# Altium PCB CCU-2.PcbDoc (part 3 of 3)
Units mm, origin at the board's own origin, x right, y up, seen from the top; angles counter-clockwise.
Board outline 52 x 56 mm, 4 copper layers (Top Layer, Int1 (GND), Int2 (PWR), Bottom Layer), stack 1.594 mm thick; 81 components, 50 nets, 261 pads, 97 vias.
Unrouted connection lines stored in the file: 64.
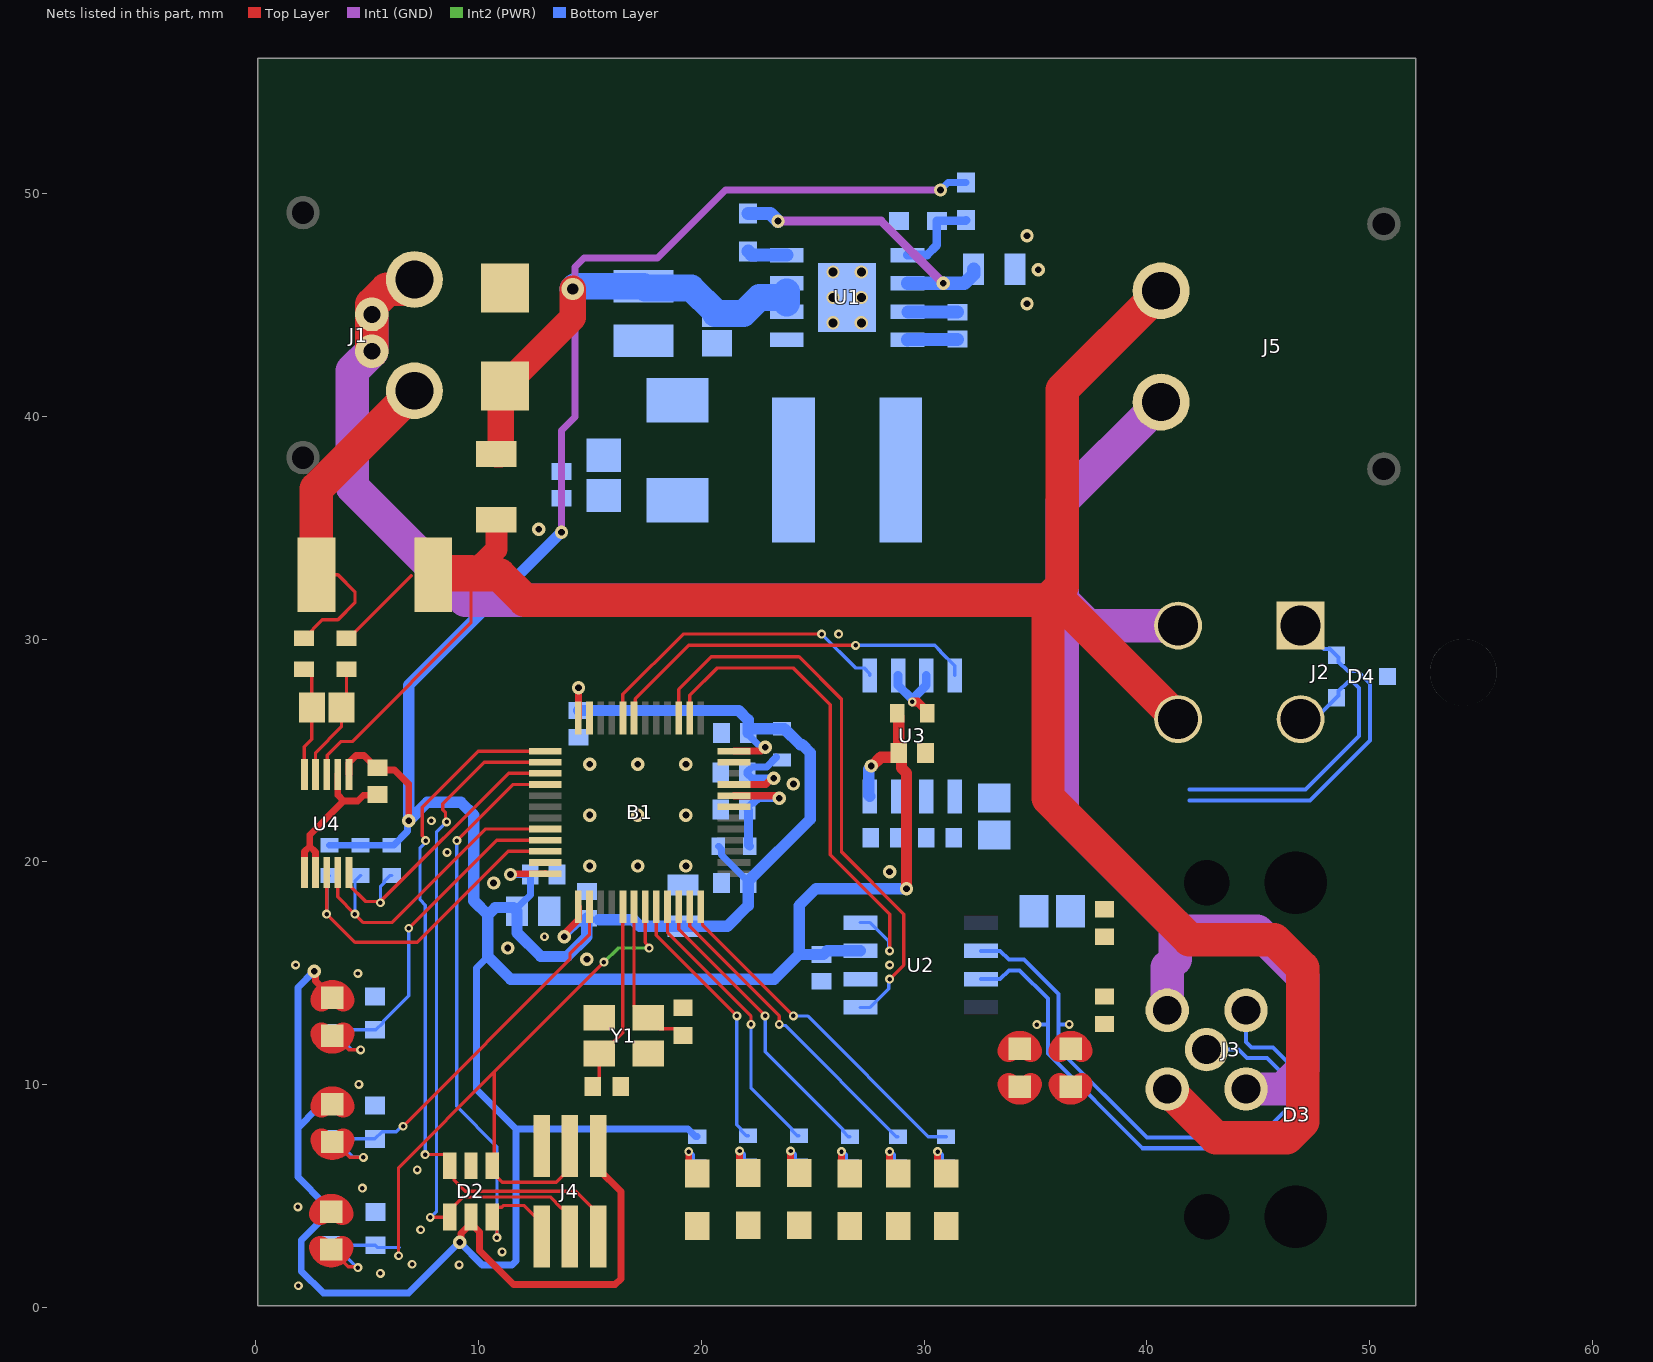
[diagram p4: the nets of this part, all layers, seen from the top]

## Part data (continued)
R1 R2: library part CMP-2100-03662-2, "RES SMD 100K OHM 1% 1/10W 0603", Case Code (Imperial)=0603, Case Code (Metric)=1608, Max Operating Temperature=155°C, Max Power Dissipation=100mW, Min Operating Temperature=-55°C, Resistance=100kR, Resistance Tolerance=1%, Resistor Type="Thick Film", Temperature Coefficient=100ppm/°C, Voltage Rating=50V, Working Voltage=75V, Case/Package=0603, Construction=Rectangular, Depth=0.8mm, Features="Moisture Resistant", Height=0.45mm, Lead Free="Lead Free", Length=1.6mm, Military Standard=Not, Number of Pins=2, Number of Terminations=2, Packaging="Tape and Reel", Power Rating=100mW, REACH SVHC="No SVHC", RoHS Compliant=Yes, Series=RC, Technology="THICK FILM", Termination=SMD/SMT, Tolerance=1%, Voltage Rating (DC)=50V, Width=0.8mm
R3: library part CMP-03412-037801-1, "RES SMD 43.2K OHM 1% 1/10W 0603", Case Code (Imperial)=0603, Case Code (Metric)=1608, Max Operating Temperature=155°C, Max Power Dissipation=100mW, Min Operating Temperature=-55°C, Package Quantity=1, Resistance=43.2kR, Resistor Type="Thick Film", Temperature Coefficient=100ppm/°C, Tolerance=1%, Voltage Rating=50V, Case/Package=0603, Construction=Rectangular, Depth=0.8mm, Features="Moisture Resistant", Height=0.45mm, Lead Free="Lead Free", Length=1.6mm, Military Standard=Not, Mount="Surface Mount", Number of Terminations=2, Packaging="Tape and Reel", Power Rating=100mW, RoHS Compliant=Yes, Series=RC, Size Code=0603, Technology="THICK FILM", Termination=SMD/SMT, Voltage Rating (DC)=50V, Width=0.031inch
R4 R12 R13 R14: library part CMP-2100-03664-2, "RES 10K OHM 1% 1/10W 0603", Case Code (Imperial)=0603, Case Code (Metric)=1608, Max Operating Temperature=155°C, Max Power Dissipation=100mW, Min Operating Temperature=-55°C, Resistance=10kR, Resistance Tolerance=1%, Resistor Type="Thick Film", Temperature Coefficient=100ppm/°C, Voltage Rating=75V, Voltage Rating (DC)=50V, Case/Package=0603, Construction=Rectangular, Depth=0.8mm, Features="Moisture Resistant", Height=0.45mm, Lead Free="Lead Free", Lead Pitch=0.3mm, Length=1.6mm, Military Standard=Not, Number of Pins=2, Number of Terminations=2, Packaging="Tape and Reel", Power Rating=100mW, RoHS Compliant=Yes, Series=RC, Size Code=0603, Termination=SMD/SMT, Tolerance=1%, Weight=7.1E-05oz, Width=0.8mm
R5 R6 R7 R8: library part CMP-02407-003155-1, "RES Thick Film, 60.4Ω, 1%, 0.1W, 100ppm/°C, 0603", Case/Package=0603, Max Operating Temperature=155°C, Max Power Dissipation=100mW, Min Operating Temperature=-55°C, Package Quantity=20000, Resistance=60.4R, Temperature Coefficient=100ppm/°C, Tolerance=1%, Composition="Thick Film", Features="Automotive AEC-Q200", Height=0.02inch, Lead Free="Lead Free", Length=0.061inch, Number of Terminations=2, Packaging="Tape and Reel", Width=0.033inch
R9 R10: library part CMP-1659-00008-4, "Chip Resistor, 10 Ohm, +/- 1%, 0.1 W, -55 to 155 degC, 0603 (1608 Metric), RoHS, Tape and Reel", Manufacturer=Yageo, Max Operating Temperature="155 degC", Min Operating Temperature="-55 degC", Package Quantity=200, Voltage Rating="50 V", ComponentLink1Description="Manufacturer URL", ComponentLink1URL=http://www.yageo.com/, ComponentLink2Description=Datasheet, ComponentLink2URL=http://www.yageo.com/documents/recent/PYu-RC_Group_51_RoHS_L_04.pdf, ComponentLink3Description="Package Specification", ComponentLink3URL=http://www.farnell.com/datasheets/443971.pdf, DatasheetVersion="Rev. 4, 02/2016", Height="0.45 mm", Length="1.6 mm", Mount="Surface Mount", Mounting Technology="Surface Mount", PackageDescription="2-Pin Surface Mount Device, Body 1.6 x 0.8 mm", PackageReference=0603, Packaging="Tape and Reel", Pins=2, REACH SVHC="No SVHC", RoHSCompliant=true
R11: library part CMP-26527-006624-1, "Foil on Ceramic Current Sensing Chip Resistor 43mΩ ±1% 2W 2512 AEC Qualified", Max Operating Temperature=170°C, Min Operating Temperature=-55°C, Tolerance=1%, Mount="Surface Mount", RoHS Compliant=Yes
R15 R16 R17: library part CMP-2000-05022-1, "Resistor, 10 KOhm, +/- 5%, 100 mW, -55 to 155 degC, 0603 (1608 Metric), RoHS, Tape and Reel", Case Code - in=0603, Case Code - mm=1608, Manufacturer=Yageo, Operating Temperature Range=-55Cto+155C, Package Description="2-Pin Surface Mount Device, Body 1.6 x 0.8 mm", Package Reference=603, Power Rating=100mW, Resistance=10kOhms, Temperature Coefficient=100PPM/C, Tolerance=5%, Voltage Rating=50V, Datasheet URL=http://www.farnell.com/datasheets/443971.pdf, Datasheet Version="Rev. 4, 04/2009", Manufacturer URL=http://www.yageo.com/, Packaging=Reel, Product=ThickFilmResistorsGeneralPurpose, Series=RC, Termination Style=SMD/SMT
R18 R19 R20 R21 R22 R23: library part CMP-1659-00009-5, "RES 1K OHM 1% 1/10W 0603", Case Code (Imperial)=0603, Case Code (Metric)=1608, Max Operating Temperature=155°C, Max Power Dissipation=100mW, Min Operating Temperature=-55°C, Resistance=1kR, Resistance Tolerance=1%, Resistor Type="Thick Film", Temperature Coefficient=100ppm/°C, Voltage Rating=50V, Case/Package=0603, Construction=Rectangular, Contact Plating=Tin, Depth=0.8mm, Features="Moisture Resistant", Height=0.45mm, Lead Free="Lead Free", Length=1.6mm, Military Standard=Not, Number of Terminations=2, Packaging="Tape and Reel", Power Rating=100mW, Radiation Hardening=No, REACH SVHC="No SVHC", RoHS Compliant=Yes, Series=RC, Size Code=0603, Technology="THICK FILM", Termination=SMD/SMT, Tolerance=1%
SB1 SB2 SB3 SB4 SB5: "Bridge 0.5mm gap, 2mm width"
U1: "SIMPLE SWITCHER® 3.8V to 36V, 3A Synchronous Buck Converter With Ultra-Low EMI 8-SO PowerPAD -40 to 125", Manufacturer="Texas Instruments", Manufacturer Lifecycle Status=ACTIVE, Max Junction Temperature (Tj)=150°C, Max Operating Temperature=125°C, Max Supply Voltage=36V, Min Operating Temperature=-40°C, Min Supply Voltage=3.8V, Mouser Part Number=595-LMR33630ADDAR, Nominal Supply Current=24µA, Output Current=3A, Supplier Part Number=296-49763-1-ND, Switching Frequency=400kHz, Arrow Part Number=LMR33630ADDAR, Arrow Price/Stock=https://www.arrow.com/en/products/lmr33630addar/texas-instruments?utm_currency=USD&region=nac, Category="Voltage Regulators - Switching", ComponentLink1Description=https://octopart.com:443/opatz8j6/c1?t=vB-rOmDI1ErJ0w3fCj8NLsfgClszgTUVbAqCYHM5mRqgzR9RBB5Pla--LZzs2g-5lBj7oDBEHLOY0DNQ8kiPC6C8g1CaFcIk5xusZs0FtDRH-CQ1FAZX0wQ7Af0vopd1OvNJ_Hrieycu-9D8HxSeoZovH4OJEcn7j74SeItdt-lCJsWpQWgV8-mVR1JIQ1KywJKCZ68bDiAWG91PubKPct48upMq1AnCkLHjDL3bhpicF0q3kjtxBAWzeDQzkpoQooz9GAvObiI6PlzZfk112pcCDh0P81IWp_Rr5acb26OlKDk2j5b40au3vy2C1-LFGDaZycRESUfyv9lqHnr9FsK7A0AJECnAAloOYp_c-_g9Mk5jVvAjSOs1Y_7rtCi9vouLs8vl&src-supplier=Texas+Instruments, ComponentLink1URL=https://octopart.com:443/opatz8j6/c1?t=vB-rOmDI1ErJ0w3fCj8NLsfgClszgTUVbAqCYHM5mRqgzR9RBB5Pla--LZzs2g-5lBj7oDBEHLOY0DNQ8kiPC6C8g1CaFcIk5xusZs0FtDRH-CQ1FAZX0wQ7Af0vopd1OvNJ_Hrieycu-9D8HxSeoZovH4OJEcn7j74SeItdt-lCJsWpQWgV8-mVR1JIQ1KywJKCZ68bDiAWG91PubKPct48upMq1AnCkLHjDL3bhpicF0q3kjtxBAWzeDQzkpoQooz9GAvObiI6PlzZfk112pcCDh0P81IWp_Rr5acb26OlKDk2j5b40au3vy2C1-LFGDaZycRESUfyv9lqHnr9FsK7A0AJECnAAloOYp_c-_g9Mk5jVvAjSOs1Y_7rtCi9vouLs8vl&src-supplier=Texas+Instruments, ComponentLink2Description=https://sigma.octopart.com:443/104526336/technical_drawing/Texas-Instruments-LMR33630ADDAR.pdf?src-supplier=Texas+Instruments, ComponentLink2URL=https://sigma.octopart.com:443/104526336/technical_drawing/Texas-Instruments-LMR33630ADDAR.pdf?src-supplier=Texas+Instruments, ComponentLink3Description=https://sigma.octopart.com:443/49250132/technical_drawing/Texas-Instruments-LMR33630ADDAR.pdf?src-supplier=Texas+Instruments, ComponentLink3URL=https://sigma.octopart.com:443/49250132/technical_drawing/Texas-Instruments-LMR33630ADDAR.pdf?src-supplier=Texas+Instruments, ComponentLink4Description=https://datasheet.octopart.com:443/LMR33630ADDAR-Texas-Instruments-datasheet-148393519.pdf?src-supplier=Upverter, ComponentLink4URL=https://datasheet.octopart.com:443/LMR33630ADDAR-Texas-Instruments-datasheet-148393519.pdf?src-supplier=Upverter, ComponentLink5Description=https://datasheet.octopart.com:443/LMR33630ADDAR-Texas-Instruments-datasheet-163730535.pdf?src-supplier=LCSC, ComponentLink5URL=https://datasheet.octopart.com:443/LMR33630ADDAR-Texas-Instruments-datasheet-163730535.pdf?src-supplier=LCSC, ComponentLink6Description=http://sigma.octopart.com:80/reach_statement/Texas-Instruments-company-64.pdf?src-supplier=Compliance+Statements, ComponentLink6URL=http://sigma.octopart.com:80/reach_statement/Texas-Instruments-company-64.pdf?src-supplier=Compliance+Statements, ComponentLink7Description=http://sigma.octopart.com:80/conflict_mineral_statement/Texas-Instruments-company-63.pdf?src-supplier=Compliance+Statements, ComponentLink7URL=http://sigma.octopart.com:80/conflict_mineral_statement/Texas-Instruments-company-63.pdf?src-supplier=Compliance+Statements, Datasheet Link=http://www.ti.com/lit/gpn/lmr33630, Geometry.Height=1.7mm, Height=1.7mm, Length=4.89mm, Lifecycle Status=Production, Manufacturer Part Number=LMR33630ADDAR, Manufacturer_Name="Texas Instruments", Manufacturer_Part_Number=LMR33630ADDAR, Max Duty Cycle=98%, Mouser Price/Stock=https://www.mouser.co.uk/ProductDetail/Texas-Instruments/LMR33630ADDAR?qs=r5DSvlrkXmJQkBTqgVdiDA%3D%3D, Number of Channels=1, Number of Outputs=1, Pins=8, Pricing="1=2,55, 10=1,895, 25=1,732, 100=1,5527, 250=1,4672, 500=1,41566, 1000=1,37324 (USD)", RoHS=Compliant, Schedule B=8542390000, Stock=3306, Supplier=DigiKey, Thickness=1.48mm, Topology=Buck, Width=3.9mm
U2: "3.3-V CAN Transceivers with CAN FD (Flexible Data Rate) 8-SOIC -40 to 125", Case/Package=SOIC, Manufacturer="Texas Instruments", Manufacturer Lifecycle Status=ACTIVE, Max Operating Temperature=125°C, Min Operating Temperature=-40°C, Supplier Part Number=296-48678-1-ND, Category="CAN Transceivers", ComponentLink1Description=https://datasheet.octopart.com:443/TCAN332GDR-Texas-Instruments-datasheet-62057962.pdf?src-supplier=Texas+Instruments, ComponentLink1URL=https://datasheet.octopart.com:443/TCAN332GDR-Texas-Instruments-datasheet-62057962.pdf?src-supplier=Texas+Instruments, ComponentLink2Description=https://octopart.com:443/opatz8j6/c1?t=Fim9K0uhurL3e-64ewRPRu2hzD6XBMTpaS3peMNeRQGdAPJMxV5dpDLVgJyuO_P4O4ggunH2lrh5amG8cDN644qOKp-rMrPHwRhWUIrHn0bzeZVVUbsr2M72b6PgQlxLldm4RQX58xtipHIVUQ9n3j21H1DkLh4_7SXPzTuHaIsBH9AF2gycgFMmCo2d18ECHdzunFD4nFXD1uZ0NZyu2cFq_vDtF5TCh3oQofcxl6XlKc8IRlGphMiWX1-H-GrJRfCOqdlBEaN3yoeUESa4Rdelhx3RTUBrPKmhDb-oLKbaFhGIFdCz5qUOKi7WlXgmp3d98vxT9kb4idGeRYMwJbKCxTgnxtzothCZpspf30IxwGF7roI0pcaKLIGA-2bwGuZ5fiI&src-supplier=Texas+Instruments, ComponentLink2URL=https://octopart.com:443/opatz8j6/c1?t=Fim9K0uhurL3e-64ewRPRu2hzD6XBMTpaS3peMNeRQGdAPJMxV5dpDLVgJyuO_P4O4ggunH2lrh5amG8cDN644qOKp-rMrPHwRhWUIrHn0bzeZVVUbsr2M72b6PgQlxLldm4RQX58xtipHIVUQ9n3j21H1DkLh4_7SXPzTuHaIsBH9AF2gycgFMmCo2d18ECHdzunFD4nFXD1uZ0NZyu2cFq_vDtF5TCh3oQofcxl6XlKc8IRlGphMiWX1-H-GrJRfCOqdlBEaN3yoeUESa4Rdelhx3RTUBrPKmhDb-oLKbaFhGIFdCz5qUOKi7WlXgmp3d98vxT9kb4idGeRYMwJbKCxTgnxtzothCZpspf30IxwGF7roI0pcaKLIGA-2bwGuZ5fiI&src-supplier=Texas+Instruments, ComponentLink3Description=https://datasheet.octopart.com:443/TCAN332GDR-Texas-Instruments-datasheet-61500394.pdf?src-supplier=Texas+Instruments, ComponentLink3URL=https://datasheet.octopart.com:443/TCAN332GDR-Texas-Instruments-datasheet-61500394.pdf?src-supplier=Texas+Instruments, ComponentLink4Description=https://sigma.octopart.com:443/49249642/technical_drawing/Texas-Instruments-TCAN332GDR.pdf?src-supplier=Texas+Instruments, ComponentLink4URL=https://sigma.octopart.com:443/49249642/technical_drawing/Texas-Instruments-TCAN332GDR.pdf?src-supplier=Texas+Instruments, ComponentLink5Description=https://datasheet.octopart.com:443/TCAN332GDR-Texas-Instruments-datasheet-192327331.pdf?src-supplier=HQonline, ComponentLink5URL=https://datasheet.octopart.com:443/TCAN332GDR-Texas-Instruments-datasheet-192327331.pdf?src-supplier=HQonline, ComponentLink6Description=https://datasheet.octopart.com:443/TCAN332GDR-Texas-Instruments-datasheet-159117518.pdf?src-supplier=LCSC, ComponentLink6URL=https://datasheet.octopart.com:443/TCAN332GDR-Texas-Instruments-datasheet-159117518.pdf?src-supplier=LCSC, ComponentLink7Description=https://datasheet.octopart.com:443/TCAN332GDR-Texas-Instruments-datasheet-149637585.pdf?src-supplier=SHENGYU+ELECTRONICS, ComponentLink7URL=https://datasheet.octopart.com:443/TCAN332GDR-Texas-Instruments-datasheet-149637585.pdf?src-supplier=SHENGYU+ELECTRONICS, ComponentLink8Description=http://sigma.octopart.com:80/reach_statement/Texas-Instruments-company-64.pdf?src-supplier=Compliance+Statements, ComponentLink8URL=http://sigma.octopart.com:80/reach_statement/Texas-Instruments-company-64.pdf?src-supplier=Compliance+Statements, ComponentLink9Description=http://sigma.octopart.com:80/conflict_mineral_statement/Texas-Instruments-company-63.pdf?src-supplier=Compliance+Statements, ComponentLink9URL=http://sigma.octopart.com:80/conflict_mineral_statement/Texas-Instruments-company-63.pdf?src-supplier=Compliance+Statements, Height=1.75mm, Lead Free="Lead Free", Length=4.9mm, Lifecycle Status=Production, Manufacturer Part Number=TCAN332GDR, Pins=8, Pricing="1=2,71, 10=2,021, 25=1,848, 100=1,6576, 250=1,56684, 500=1,53152 (USD)", RoHS=Compliant, Stock=4774, Supplier=DigiKey, Thickness=1.58mm, Width=3.91mm
U3: "3.3-V to 5-V 500-Kbps half-duplex RS-485 transceiver auto-direction control ±12-kV IEC ESD 8-SOIC -40 to 125", Case/Package=SOIC, Manufacturer="Texas Instruments", Manufacturer Lifecycle Status=ACTIVE, Supplier Part Number=296-THVD1406DRCT-ND, Category="Integrated Circuits (ICs)", ComponentLink1Description=https://octopart.com:443/opatz8j6/c1?t=2lI__BkUQ1xwY9kHNd8eYxCAM8iLM_FgltEQ1IO6ko7_J5dzlRfErhoS2VuXg-axmu35tHe6xFiPe7MYKPFvV-dy3nIG9s3NJA0ErWfdrKDirdlmgh356IG-PQ2XWgFJDCJccpoQtQsg13hA_5m5lKyDGmkMVNChYEag8uk4WHNZpCeqeZyq-o13vnhtIUj1o03Pf3jmRR3w8kDw90f-34G7o4yUBoqAoakg1O24sFCcCpS3f5lc8pghjzV8L4mAcKX6y6PNE8Xs84P_YNErqjUnXhKNxf-NFzK6TWa9jK5NPoG9ddsY0OtA5ykFXF75BaeKJ_s9JvLxqkj3BXgq8qynINgxI_OyH86OW_yPFQ_-wlcyMHijrRmTrvovB-5KRqPFqPLR&src-supplier=Texas+Instruments, ComponentLink1URL=https://octopart.com:443/opatz8j6/c1?t=2lI__BkUQ1xwY9kHNd8eYxCAM8iLM_FgltEQ1IO6ko7_J5dzlRfErhoS2VuXg-axmu35tHe6xFiPe7MYKPFvV-dy3nIG9s3NJA0ErWfdrKDirdlmgh356IG-PQ2XWgFJDCJccpoQtQsg13hA_5m5lKyDGmkMVNChYEag8uk4WHNZpCeqeZyq-o13vnhtIUj1o03Pf3jmRR3w8kDw90f-34G7o4yUBoqAoakg1O24sFCcCpS3f5lc8pghjzV8L4mAcKX6y6PNE8Xs84P_YNErqjUnXhKNxf-NFzK6TWa9jK5NPoG9ddsY0OtA5ykFXF75BaeKJ_s9JvLxqkj3BXgq8qynINgxI_OyH86OW_yPFQ_-wlcyMHijrRmTrvovB-5KRqPFqPLR&src-supplier=Texas+Instruments, ComponentLink2Description=https://datasheet.octopart.com:443/THVD1406DR-Texas-Instruments-datasheet-183820944.pdf?src-supplier=LCSC, ComponentLink2URL=https://datasheet.octopart.com:443/THVD1406DR-Texas-Instruments-datasheet-183820944.pdf?src-supplier=LCSC, ComponentLink3Description=https://datasheet.octopart.com:443/THVD1406DR-Texas-Instruments-datasheet-165811890.pdf?src-supplier=Augswan, ComponentLink3URL=https://datasheet.octopart.com:443/THVD1406DR-Texas-Instruments-datasheet-165811890.pdf?src-supplier=Augswan, ComponentLink4Description=http://sigma.octopart.com:80/reach_statement/Texas-Instruments-company-64.pdf?src-supplier=Compliance+Statements, ComponentLink4URL=http://sigma.octopart.com:80/reach_statement/Texas-Instruments-company-64.pdf?src-supplier=Compliance+Statements, ComponentLink5Description=http://sigma.octopart.com:80/conflict_mineral_statement/Texas-Instruments-company-63.pdf?src-supplier=Compliance+Statements, ComponentLink5URL=http://sigma.octopart.com:80/conflict_mineral_statement/Texas-Instruments-company-63.pdf?src-supplier=Compliance+Statements, Height=1.75mm, Length=4.9mm, Lifecycle Status=Production, Manufacturer Part Number=THVD1406DR, Pins=8, Pricing="1=1,72, 10=1,257, 25=1,1424, 100=1,0164, 250=0,95628, 500=0,92002, 1000=0,91494 (USD)", RoHS=Compliant, Stock=2789, Supplier=DigiKey, Thickness=1.58mm, Width=3.91mm
U4: "85-V, 16-bit, high-precision I2C output current/voltage/power monitor with alert 10-VSSOP -40 to 125", Case/Package=VSSOP, Manufacturer="Texas Instruments", Manufacturer Lifecycle Status=ACTIVE, Mouser Part Number=595-INA238AIDGSR, Supplier Part Number=296-INA238AIDGSRCT-ND, Arrow Part Number=INA238AIDGSR, Arrow Price/Stock=https://www.arrow.com/en/products/ina238aidgsr/texas-instruments?utm_currency=USD&region=nac, Category="Power Management ICs", ComponentLink1Description=https://octopart.com:443/opatz8j6/c1?t=XyVZTLNm9_ePY3ZGc7WnwxCxujItchuRLJj6CkysUxGARineyf7S9W1lTZtpdvGrKN9PqufXH2Vp5DF4iI0PAmLVRxJtPCoqMa_3Yx7EmCUprcLp9cc2z3mxrocYZYu_H6tNB4RLIZX8yc2_jZwFvl9kWmpghyBnfmfPNCcCHj9WG1KUH3fGvWh-B3Dty5OndKwLiTMuCynuZqQEMvhHYq8OKaCYxicPR-4azPIH5DLbeaRheWP409TW7_NNkIoSlBggBZt8vUz1AkFskQTI-fVfUp_rKcfapwS7xCCwZOKssU3R1jKvkQDpIuWALrIH0VMSswAvOfD7rtoRLVW_XHJHwA1DZFqMh2nUzRUR_hOiShUwC6jqqC2oc9QjG34mHHd3ibY&src-supplier=Texas+Instruments, ComponentLink1URL=https://octopart.com:443/opatz8j6/c1?t=XyVZTLNm9_ePY3ZGc7WnwxCxujItchuRLJj6CkysUxGARineyf7S9W1lTZtpdvGrKN9PqufXH2Vp5DF4iI0PAmLVRxJtPCoqMa_3Yx7EmCUprcLp9cc2z3mxrocYZYu_H6tNB4RLIZX8yc2_jZwFvl9kWmpghyBnfmfPNCcCHj9WG1KUH3fGvWh-B3Dty5OndKwLiTMuCynuZqQEMvhHYq8OKaCYxicPR-4azPIH5DLbeaRheWP409TW7_NNkIoSlBggBZt8vUz1AkFskQTI-fVfUp_rKcfapwS7xCCwZOKssU3R1jKvkQDpIuWALrIH0VMSswAvOfD7rtoRLVW_XHJHwA1DZFqMh2nUzRUR_hOiShUwC6jqqC2oc9QjG34mHHd3ibY&src-supplier=Texas+Instruments, ComponentLink2Description=https://datasheet.octopart.com:443/INA238AIDGSR-Texas-Instruments-datasheet-165811307.pdf?src-supplier=Augswan, ComponentLink2URL=https://datasheet.octopart.com:443/INA238AIDGSR-Texas-Instruments-datasheet-165811307.pdf?src-supplier=Augswan, ComponentLink3Description=https://datasheet.octopart.com:443/INA238AIDGSR-Texas-Instruments-datasheet-169738673.pdf?src-supplier=LCSC, ComponentLink3URL=https://datasheet.octopart.com:443/INA238AIDGSR-Texas-Instruments-datasheet-169738673.pdf?src-supplier=LCSC, ComponentLink4Description=http://sigma.octopart.com:80/reach_statement/Texas-Instruments-company-64.pdf?src-supplier=Compliance+Statements, ComponentLink4URL=http://sigma.octopart.com:80/reach_statement/Texas-Instruments-company-64.pdf?src-supplier=Compliance+Statements, ComponentLink5Description=http://sigma.octopart.com:80/conflict_mineral_statement/Texas-Instruments-company-63.pdf?src-supplier=Compliance+Statements, ComponentLink5URL=http://sigma.octopart.com:80/conflict_mineral_statement/Texas-Instruments-company-63.pdf?src-supplier=Compliance+Statements, Datasheet Link=https://www.ti.com/lit/ds/symlink/ina238.pdf?ts=1623483707955&ref_url=https%253A%252F%252Fwww.ti.com%252Fstore%252Fti%252Fen%252Fp%252Fproduct%252F%253Fp%253DINA238AIDGSR, Height=1.1mm, Length=3mm, Lifecycle Status=Production, Manufacturer Part Number=INA238AIDGSR, Manufacturer_Name="Texas Instruments", Manufacturer_Part_Number=INA238AIDGSR, Mouser Price/Stock=https://www.mouser.co.uk/ProductDetail/Texas-Instruments/INA238AIDGSR?qs=DRkmTr78QAQpWvQMAkqDfQ%3D%3D, Pins=10, Pricing="1=3,26, 10=2,447, 25=2,2428, 100=2,0184, 250=1,91132, 500=1,88344 (USD)", RoHS=Compliant, Schedule B="8542390000, 8542390000|8542390000|8542390000|8542390000|8542390000|8542390000|8542390000|8542390000|8542390000|8542390000|8542390000|8542390000|8542390000|8542390000|8542390000|8542390000|8542390000|8542390000|8542390000|8542390000|8542390000|8542390000|8542390000|85", Supplier=DigiKey, Supplier 1=DigiKey, Supplier Part Number 1=296-INA238AIDGSRCT-ND, Thickness=1.02mm, Width=3mm
Y1: library part CMP-27762-013973-3, "Crystal 24MHz ±10ppm (Tol) ±20ppm (Stability) 8pF FUND 50Ω 4-Pin SMD T/R"

## Via types
v1: diameter 0.4, hole 0.2, Top Layer to Bottom Layer, 35 vias
v2: diameter 0.6, hole 0.3, Top Layer to Bottom Layer, 33 vias
v3: diameter 0.4, hole 0.2, Top Layer to Bottom Layer, tented both sides, 13 vias
v4: diameter 0.6, hole 0.4, Top Layer to Bottom Layer, 6 vias
v5: diameter 0.4, hole 0.2, Top Layer to Bottom Layer, tented bottom, 4 vias
v6: diameter 1.5, hole 0.75, Top Layer to Bottom Layer, 2 vias
v7: diameter 6.5, hole 3.5, Top Layer to Bottom Layer, 2 vias
v8: diameter 0.6, hole 0.3, Top Layer to Bottom Layer, tented both sides, 1 vias
v9: diameter 1, hole 0.5, Top Layer to Bottom Layer, 1 vias

## Nets (pads, with @x,y where several pads share a name; then routed paths per layer and width w, separated by ;. In a path a pad name is that pad's centre, name@x,y a point inside that pad or via, vN(x,y) a via of type N, cw(c..) or ccw(c..) an arc to the next point about the centre after c; other vN are vias at no path point)
+3V3: B1.1 B1.24 B1.36 B1.48 C2.2 C3.1 C4.2 C10.1 C11.1 C13.1 C21.1 C22.1 C23.1 C24.1 C25.1 C26.1 C27.1 D2.5 FB1.2 FB2.2 J4.1 L1.2 R2.1 R4.2 R12.2 R13.2 R14.2 R15.2 R16.2 R23.2 SB3.1 U2.3 U3.8 U4.6 | length 220.3
  Top Layer w0.31: v2(2.616,15.088) 2.672,15.032 2.672,14.649 3.143,14.178 SB3.1@3.313,14.178 ; U4.6@4.175,23.917 4.175,24.457 4.483,24.765 4.843,24.765 5.386,24.222 C13.1@5.461,24.222 5.553,24.13 6.223,24.13 6.858,23.495 v2(6.858,21.844) ; v2(9.144,2.921) 9.199,2.976 9.199,3.304 D2.5@9.652,3.757 ; D2.5@9.652,4.057 D2.5@9.652,3.757 ; v2(11.43,19.431) 11.465,19.466 12.982,19.466 B1.48@12.987,19.471 ; v2(13.843,16.637) 13.898,16.692 13.898,16.829 14.475,17.405 B1.1@14.475,17.983 ; B1.36@14.475,26.459 14.477,26.461 14.477,27.812 v2(14.478,27.813) ; J4.1@15.367,7.242 15.367,6.217 16.383,5.201 16.383,1.27 16.129,1.016 11.557,1.016 10.033,2.54 10.033,3.376 D2.5@9.652,3.757 ; B1.24@21.463,24.971 22.685,24.971 v2(22.86,25.146)
  Top Layer w0.51: v2(27.629,24.303) 27.653,24.303 28.048,24.697 28.744,24.697 C11.1@28.864,24.817 ; R4.2@28.787,26.67 28.787,26.593 28.864,26.517 C11.1@28.864,24.892 C11.1@28.864,24.817 ; v2(29.21,18.796) 29.21,23.988 28.984,24.214 28.984,24.697 C11.1@28.864,24.817
  Int1 (GND) w0.31: v8(13.716,34.798) 13.716,39.37 14.319,39.973 14.319,46.704 14.732,47.117 18.034,47.117 21.082,50.165 v2(30.734,50.165)
  Bottom Layer w0.31: v2(2.616,15.088) 1.88,14.351 1.88,8.052 ; R12.2@3.302,20.743 R13.2@4.699,20.743 R14.2@6.096,20.743 6.173,20.743 6.803,21.373 6.803,21.789 v2(6.858,21.844) ; R16.2@3.429,4.294 R16.2@3.329,4.294 ; R15.2@3.429,9.059 3.285,8.915 2.743,8.915 1.88,8.052 ; 10.414,15.748 9.906,15.24 9.906,9.779 11.677,8.008 ; v2(11.43,19.431) C25.1@12.319,19.431 12.319,18.516 12.137,18.334 12.123,18.334 C23.1@11.72,17.931 ; v2(13.843,16.637) 14.605,17.399 14.85,17.399 C26.1@15.113,17.399 ; C24.1@14.478,26.797 v2(14.478,27.813) ; 15.367,17.399 15.401,17.399 ; R23.2@19.812,7.662 19.735,7.662 19.396,8.001 11.684,8.001 11.677,8.008 ; FB2.2@20.763,20.701 20.908,20.556 20.908,20.315 C21.1@22.098,19.125 ; C27.1@22.098,25.706 22.603,25.201 22.805,25.201 v2(22.86,25.146) ; v2(30.734,50.165) 31.076,50.507 R2.1@31.877,50.507 ; 1.88,8.052 1.88,5.843 3.084,4.639 3.084,4.539 R16.2@3.329,4.294 ; R16.2@3.329,4.294 2.032,2.997 2.032,1.626 3.023,0.635 6.858,0.635 v2(9.144,2.921) 10.16,1.905 11.495,1.905 11.677,2.087 11.677,8.008
  Bottom Layer w0.51: v8@13.699,34.781 6.858,27.94 v2(6.858,21.844) 7.683,22.669 9.207,22.669 9.779,22.098 9.779,18.25 10.414,17.615 ; C24.1@14.478,26.797 21.672,26.797 22.098,26.371 C27.1@22.098,25.853 ; C26.1@14.859,17.469 14.85,17.46 14.85,17.399 14.85,16.628 13.97,15.748 12.79,15.748 11.72,16.819 C23.1@11.72,17.78 11.548,17.951 10.751,17.951 10.414,17.615 ; 15.401,17.399 16.942,17.399 17.232,17.109 C22.1@19.177,17.109 21.173,17.109 22.098,18.034 C21.1@22.098,19.05 22.098,19.125 24.892,21.919 24.892,24.892 24.531,25.253 24.442,25.253 23.722,25.973 FB1.2@23.622,25.973 22.218,25.973 C27.1@22.098,25.853 ; C27.1@22.098,25.781 C27.1@22.098,25.853 ; U2.3@27.133,16.002 25.637,16.002 25.475,15.84 24.384,15.84 ; U3.8@27.559,22.942 27.52,22.981 27.52,24.169 27.629,24.278 v2(27.629,24.303) ; v2(29.21,18.796) 25.146,18.796 24.384,18.034 24.384,15.84 ; 10.414,17.615 10.414,15.748 11.43,14.732 23.276,14.732 24.384,15.84
+12V: C5.1 C6.1 D1.1 F1.2 U1.2 U1.3 | length 19.9
  Top Layer w1.2: F1.2@10.795,38.305 10.966,38.305 10.986,38.325 10.986,41.17 D1.1@11.176,41.361 ; D1.1@11.176,41.386 14.224,44.434 v9(14.224,45.72)
  Bottom Layer w1.2: v9(14.224,45.72) 14.351,45.847 C5.1@17.399,45.847 17.48,45.766 19.542,45.766 20.623,44.684 20.623,44.617 20.69,44.617 C6.1@20.701,44.606 20.712,44.617 21.884,44.617 22.606,45.339 23.831,45.339 ; 23.831,45.085 23.831,45.339 ; 23.831,45.593 23.831,45.339
+12V_EXT: F1.1 J1.1 R9.2 R11.2 | length 16
  Top Layer w0.15: R9.2@2.159,30.037 2.983,30.861 3.683,30.861 4.445,31.623 4.445,32.131 3.683,32.893 R11.2@2.708,32.893
  Top Layer w1: F1.1@10.795,35.355 11.096,35.355 F1.1@11.176,35.275
  Top Layer w1.5: R11.2@2.708,32.893 2.708,36.744 J1.1@7.112,41.148
+12V_ISO: J2.4 J3.2 J5.1 R10.2 R11.1 U4.8 | length 110.6
  Top Layer w0.15: U4.8@3.175,23.917 3.198,23.94 3.198,24.788 3.81,25.4 4.318,25.4 9.652,30.734 9.652,32.893 ; R10.2@4.064,30.037 4.164,30.037 6.97,32.843
  Top Layer w1: 9.652,32.893 10.795,34.036 10.795,35.355
  Top Layer w1.5: R11.1@7.91,32.843 R11.1@7.96,32.893 ; 9.652,33.02 8.087,33.02 R11.1@7.96,32.893 ; J5.1@40.64,45.64 36.195,41.195 36.195,32.385 35.56,31.75 ; J3.2@40.914,9.799 43.093,7.62 46.287,7.62 46.99,8.323 46.99,15.24 45.72,16.51 41.91,16.51 35.56,22.86 35.56,31.75 ; J2.4@41.402,26.407 36.059,31.75 35.56,31.75 ; R11.1@7.96,32.893 9.652,32.893 10.922,32.893 12.065,31.75 35.56,31.75
BOOT0: B1.45 C14.1 R17.2 SB3.2 | length 17.8
  Top Layer w0.15: SB3.2@3.429,11.892 3.829,11.892 4.164,11.557 v1(4.699,11.557) ; v1(6.858,17.018) 10.803,20.963 12.979,20.963 B1.45@12.987,20.971
  Bottom Layer w0.15: R17.2@3.429,12.319 3.529,12.319 4.274,11.574 4.682,11.574 v1(4.699,11.557) ; R17.2@3.479,12.369 3.568,12.458 C14.1@5.334,12.458 ; C14.1@5.384,12.458 5.709,12.783 5.709,12.833 6.858,13.982 v1(6.858,17.018)
CAN_N: D3.1 J3.5 SB2.1 U2.6 | length 25.3
  Bottom Layer w0.18: U2.6@32.557,16.002 33.41,16.002 33.805,15.607 34.489,15.607 36.04,14.056 36.04,12.7 ; v1(36.516,12.7) 36.04,12.7 ; J3.5@42.682,11.567 44.111,11.567 44.489,11.188 45.397,11.188 46.086,10.499 D3.1@46.086,9.561 ; D3.1@46.201,9.471 46.296,9.376 46.401,9.376 46.506,9.271 46.506,9.117 45.009,7.62 40.005,7.62 36.04,11.585 36.04,12.7
CAN_P: D3.2 J3.4 SB1.1 U2.7 | length 27
  Bottom Layer w0.18: U2.7@32.557,14.732 33.41,14.732 33.805,15.127 34.29,15.127 35.56,13.857 35.56,12.622 ; v1(35.064,12.688) 35.494,12.688 35.56,12.622 ; J3.4@44.45,13.335 44.45,11.906 44.688,11.668 45.661,11.668 47.328,10.001 47.328,9.619 D3.2@47.386,9.561 47.201,9.376 47.071,9.376 46.966,9.271 46.966,8.926 45.2,7.16 45.18,7.14 39.806,7.14 35.56,11.386 35.56,12.622
CAN_RX: B1.26 U2.4 | length 22.7
  Top Layer w0.15: B1.26@19.475,26.459 19.475,27.476 20.701,28.702 24.13,28.702 25.781,27.051 25.781,20.32 28.448,17.653 v1(28.448,16.002)
  Bottom Layer w0.15: U2.4@27.133,17.272 27.57,17.272 28.416,16.427 28.416,16.034 v1(28.448,16.002)
CAN_TX: B1.27 U2.1 | length 26.1
  Top Layer w0.15: B1.27@18.975,26.459 18.975,27.738 20.447,29.21 24.384,29.21 26.289,27.305 26.289,20.447 29.083,17.653 29.083,15.367 v1(28.448,14.732)
  Bottom Layer w0.15: U2.1@27.133,13.462 27.57,13.462 28.416,14.307 28.416,14.7 v1(28.448,14.732)
GND: B1.19 B1.23 B1.35 B1.47 C2.1 C3.2 C4.1 C5.2 C6.2 C7.2 C8.1 C9.1 C10.2 C11.2 C13.2 C14.2 C15.2 C16.2 C17.1 C18.1 C19.2 C20.2 C21.2 C22.2 C23.2 C24.2 C25.2 C26.2 C27.2 D1.2 D2.2 D3.3 D4.3 D5.2 D6.2 D7.2 D8.2 D9.2 D10.2 J1.2 J4.5 NT1.1 R3.2 R17.1 SB4.2 SB5.2 U1.1 U1.9 U2.2 U3.5 U4.1 U4.2 U4.7 Y1.2 Y1.4 | length 11
  Top Layer w0.3: U4.1@2.175,19.517 2.175,20.463 2.413,20.701 ; U4.2@2.675,19.517 2.675,20.439 2.413,20.701 ; U4.7@3.675,23.917 3.675,22.995 3.937,22.733 ; C13.2@5.461,23.022 5.426,22.987 4.826,22.987 4.572,22.733 3.937,22.733 ; 2.413,20.701 2.413,21.209 3.937,22.733
  Top Layer w1.5: 5.207,44.577 NT1.1@5.207,45.027 5.878,45.698 6.662,45.698 J1.2@7.112,46.148
  other v1: 11.049,2.489 28.448,15.367 12.954,16.637 8.585,20.422 7.874,21.844 26.162,30.226
  other v2: 14.859,15.621 11.303,16.129 10.668,19.05 28.448,19.558 14.986,19.812 17.145,19.812 19.304,19.812 14.986,22.098 17.145,22.098 19.304,22.098 24.13,23.495 14.986,24.384 17.145,24.384 19.304,24.384 12.7,34.925 34.619,45.056 35.127,46.58 34.619,48.104
  other v3: 1.905,0.965 5.588,1.524 1.881,4.509 4.777,5.347 4.623,10.008 4.572,14.986 1.778,15.367
  other v4: 25.908,44.196 27.178,44.196 25.908,45.339 27.178,45.339 25.908,46.482 27.178,46.482
  other v5: 9.119,1.905 7.01,1.93 7.391,3.48 7.239,6.172
GND_ISO: J2.3 J3.1 J3.3 J5.2 NT1.2 | length 94.5
  Top Layer w1.5: v6(5.207,42.926) NT1.2@5.207,44.077 v6(5.207,44.577)
  Int1 (GND) w1.5: v6(5.207,44.577) v6(5.207,42.926) 4.336,42.055 4.318,42.055 4.318,36.83 9.398,31.75 36.195,31.75 ; J5.2@40.64,40.64 36.195,36.195 36.195,31.75 ; J3.1@40.914,13.335 40.914,15.271 41.275,15.632 41.275,16.891 ; J2.3@41.402,30.607 37.338,30.607 36.195,31.75 ; J3.3@44.45,9.799 46.111,9.799 46.99,10.678 46.99,14.859 44.958,16.891 41.275,16.891 ; 36.195,31.75 36.195,22.225 41.275,17.145 41.275,16.891
HSE_IN: B1.5 C17.2 Y1.1 | length 8.7
  Top Layer w0.15: C17.2@15.123,9.906 15.41,10.193 Y1.1@15.41,11.392 15.535,11.392 16.475,12.332 B1.5@16.475,17.983
HSE_OUT: B1.6 C18.2 Y1.3 | length 7.2
  Top Layer w0.15: B1.6@16.975,17.983 16.975,13.502 17.485,12.992 Y1.3@17.61,12.992 18.1,12.502 18.877,12.502 C18.2@19.177,12.202
INA_ALERT: B1.46 R12.1 U4.3 | length 15.7
  Top Layer w0.15: U4.3@3.175,19.517 v1(3.175,17.653) 4.445,16.383 7.239,16.383 11.327,20.471 B1.46@12.987,20.471
  Bottom Layer w0.15: v1(3.175,17.653) 3.175,19.262 R12.1@3.302,19.389
INA_SCL: B1.39 R14.1 U4.5 | length 13.6
  Top Layer w0.15: U4.5@4.175,19.517 4.175,18.967 4.924,18.218 5.531,18.218 v1(5.588,18.161) 5.588,18.218 11.341,23.971 B1.39@12.987,23.971
  Bottom Layer w0.15: v1(5.588,18.161) 5.588,18.881 5.765,19.058 5.765,19.135 6.019,19.389 R14.1@6.096,19.389
INA_SDA: B1.44 R13.1 U4.4 | length 14.5
  Top Layer w0.15: U4.4@3.675,19.517 3.675,18.423 v1(4.445,17.653) 4.826,17.272 6.096,17.272 10.295,21.471 B1.44@12.987,21.471
  Bottom Layer w0.15: v1(4.445,17.653) 4.445,19.135 R13.1@4.699,19.389
JTAG_RESET: B1.7 C16.1 D2.1 J4.3 R16.1 SB5.1 | length 36.6
  Top Layer w0.15: SB5.1@3.456,2.583 SB5.1@3.571,2.583 ; SB5.1@3.54,2.433 4.147,1.826 4.524,1.826 v1(4.572,1.778) ; v1@6.401,2.362 6.401,6.274 10.7,10.573 ; J4.3@14.097,7.242 14.097,6.217 13.49,5.61 11.049,5.61 10.602,6.057 D2.1@10.602,6.357 10.7,6.455 10.7,10.573 ; v1(15.621,15.494) 10.7,10.573 ; B1.7@17.475,17.983 17.475,16.375 17.653,16.197 v1(17.653,16.129)
  Int2 (PWR) w0.15: v1(15.621,15.494) 16.256,16.129 v1(17.653,16.129)
  Bottom Layer w0.15: R16.1@3.429,2.794 3.529,2.794 4.545,1.778 v1(4.572,1.778) ; R16.1@3.556,2.782 C16.1@5.361,2.782 5.463,2.68 6.428,2.68
  other v1: 6.401,2.311
JTAG_SWCLK: B1.38 D2.4 J4.4 | length 32.5
  Top Layer w0.15: v1(7.823,4.039) 8.684,4.039 D2.4@8.702,4.057 8.702,4.357 9.298,4.953 13.208,4.953 13.716,4.445 13.802,4.445 14.097,4.15 J4.4@14.097,3.172 ; v1(8.56,21.793) 8.512,21.841 8.512,22.209 8.382,22.339 8.382,22.606 10.247,24.471 B1.38@12.987,24.471
  Bottom Layer w0.15: v1@7.849,4.039 8.103,4.293 8.103,21.336 v1(8.56,21.793)
JTAG_SWDIO: B1.37 D2.3 J4.2 | length 32.7
  Top Layer w0.15: v1(7.595,6.858) 8.477,6.858 8.702,6.633 D2.3@8.702,6.357 8.89,6.169 8.89,5.715 9.398,5.207 14.357,5.207 15.367,4.197 J4.2@15.367,3.172 ; v1(7.62,20.955) 7.62,21.015 7.468,21.168 7.468,22.454 9.985,24.971 B1.37@12.987,24.971
  Bottom Layer w0.15: v1(7.595,6.858) 7.595,18.059 7.366,18.288 7.366,20.633 7.62,20.887 v1(7.62,20.955)
JTAG_SWO: B1.40 D2.6 J4.6 | length 28.1
  Top Layer w0.15: v1(9.017,20.955) 11.533,23.471 B1.40@12.987,23.471 ; v1(10.82,3.124) 10.82,3.839 D2.6@10.602,4.057 10.602,4.269 10.827,4.494 11.039,4.494 11.117,4.572 12.017,4.572 12.827,3.762 J4.6@12.827,3.172
  Bottom Layer w0.15: v1(9.017,20.955) 9.017,9.017 10.82,7.214 v1(10.82,3.124)
LED_CAN_ERR: B1.8 R20.2 | length 12
  Top Layer w0.15: B1.8@17.975,17.983 17.975,16.696 v1(21.59,13.081)
  Bottom Layer w0.15: v1(21.59,13.081) 21.59,8.202 21.767,8.025 21.767,7.948 22.021,7.694 R20.2@22.098,7.694
LED_CAN_RUN: B1.9 R21.2 | length 12.8
  Top Layer w0.15: B1.9@18.475,17.983 18.475,16.831 22.225,13.081 v1(22.225,12.7)
  Bottom Layer w0.15: v1(22.225,12.7) 22.225,9.853 24.053,8.025 24.053,7.948 24.307,7.694 R21.2@24.384,7.694
LED_RS_ERR: B1.10 R18.2 | length 13.6
  Top Layer w0.15: B1.10@18.975,17.983 18.975,16.966 v1(22.86,13.081)
  Bottom Layer w0.15: v1(22.86,13.081) 22.86,11.472 26.339,7.993 26.339,7.916 26.593,7.662 R18.2@26.67,7.662
LED_RS_RUN: B1.11 R19.2 | length 14.4
  Top Layer w0.15: B1.11@19.475,17.983 19.475,17.101 23.495,13.081 v1(23.495,12.7)
  Bottom Layer w0.15: v1(23.495,12.7) 23.543,12.652 23.762,12.652 28.752,7.662 R19.2@28.829,7.662
LED_STATUS: B1.12 R22.2 | length 15.7
  Top Layer w0.15: B1.12@19.975,17.983 20.05,17.908 20.05,17.161 v1(24.13,13.081)
  Bottom Layer w0.15: v1(24.13,13.081) 24.765,13.081 30.184,7.662 R22.2@30.988,7.662
NetC1_1: C1.1 L1.1 U1.8 | length 2.2
  Bottom Layer w0.6: U1.8@29.255,43.434 29.273,43.452 C1.1@31.478,43.452
NetC1_2: C1.2 U1.7 | length 2.3
  Bottom Layer w0.39: U1.7@29.255,44.704 U1.7@29.273,44.686 ; C1.2@31.478,44.686 C1.2@31.496,44.669
  Bottom Layer w0.6: U1.7@29.273,44.686 C1.2@31.478,44.686
NetC7_1: C7.1 R1.1 U1.6 | length 13.4
  Int1 (GND) w0.39: v2(23.438,48.768) 28.067,48.768 v2(30.861,45.974)
  Bottom Layer w0.6: R1.1@22.098,49.11 23.096,49.11 v2(23.438,48.768) ; U1.6@29.255,45.974 31.812,45.974 32.222,46.384 C7.1@32.222,46.609
NetC8_2: C8.2 R7.2 R8.2
NetC9_2: C9.2 R5.2 R6.2
NetC12_1: C12.1 R9.1 U4.10 | length 5
  Top Layer w0.15: R9.1@2.159,28.637 2.236,28.637 2.511,28.362 C12.1@2.511,26.924 2.511,25.498 2.175,25.162 U4.10@2.175,23.917
NetC12_2: C12.2 R10.1 U4.9 | length 5.3
  Top Layer w0.15: U4.9@2.675,23.917 2.675,24.9 3.839,26.064 C12.2@3.839,26.924 4.064,27.149 R10.1@4.064,28.637
NetD5_1: D5.1 R18.1 | length 2
  Top Layer w0.31: v3(26.289,6.985) 26.289,6.382 D5.1@26.67,6.001
  Bottom Layer w0.31: v3(26.289,6.985) 26.289,6.961 26.419,6.831 26.419,6.483 26.593,6.308 R18.1@26.67,6.308
NetD6_1: D6.1 R19.1 | length 2
  Top Layer w0.31: v3(28.448,6.985) 28.448,6.382 D6.1@28.829,6.001
  Bottom Layer w0.31: v3(28.448,6.985) 28.448,6.961 28.578,6.831 28.578,6.483 28.752,6.308 R19.1@28.829,6.308
NetD7_1: D7.1 R20.1 | length 2
  Top Layer w0.31: v3(21.717,7.017) 21.717,6.414 D7.1@22.098,6.033
  Bottom Layer w0.31: v3(21.717,7.017) 21.717,6.993 21.847,6.863 21.847,6.515 22.021,6.34 R20.1@22.098,6.34
NetD8_1: D8.1 R21.1 | length 2
  Top Layer w0.31: v3(24.003,7.017) 24.003,6.414 D8.1@24.384,6.033
  Bottom Layer w0.31: v3(24.003,7.017) 24.003,6.993 24.133,6.863 24.133,6.515 24.307,6.34 R21.1@24.384,6.34
NetD9_1: D9.1 R22.1 | length 2
  Top Layer w0.31: v3(30.607,6.985) 30.607,6.382 D9.1@30.988,6.001
  Bottom Layer w0.31: v3(30.607,6.985) 30.607,6.961 30.737,6.831 30.737,6.483 30.911,6.308 R22.1@30.988,6.308
NetD10_1: D10.1 R23.1 | length 2
  Top Layer w0.31: v3(19.431,6.985) 19.431,6.382 D10.1@19.812,6.001
  Bottom Layer w0.31: v3(19.431,6.985) 19.431,6.961 19.561,6.831 19.561,6.483 19.735,6.308 R23.1@19.812,6.308
NetR1_2: R1.2 U1.4 | length 1.8
  Bottom Layer w0.6: R1.2@22.098,47.41 22.264,47.244 U1.4@23.831,47.244
NetR2_2: R2.2 R3.1 U1.5 | length 3.9
  Bottom Layer w0.39: U1.5@29.255,47.244 30.125,47.244 30.568,47.687 R3.1@30.568,48.768 30.588,48.787 31.858,48.787 R2.2@31.877,48.807
NetR4_1: R4.1 U3.2 U3.3 | length 3.8
  Top Layer w0.39: v1(29.464,27.178) 29.466,27.176 29.711,27.176 30.141,26.747 R4.1@30.141,26.67
  Bottom Layer w0.39: U3.2@28.829,28.366 28.829,27.929 29.464,27.294 v1(29.464,27.178) 29.466,27.18 29.466,27.295 30.099,27.929 U3.3@30.099,28.366
NetR7_1: R7.1 SB1.2
NetR8_1: R8.1 SB2.2
RS485_N: D4.2 J2.1 R5.1 U3.7 | length 16.1
  Bottom Layer w0.18: 41.91,22.761 47.316,22.761 50.01,25.455 50.01,28.012 49.461,28.561 49.022,28.561 48.602,28.981 48.602,29.181 D4.2@48.512,29.271 48.23,29.553 47.956,29.553 J2.1@46.902,30.607
RS485_P: D4.1 J2.2 R6.1 U3.6 | length 14.3
  Bottom Layer w0.18: 41.91,23.241 47.117,23.241 49.53,25.654 49.53,27.813 49.262,28.081 49.022,28.081 48.602,27.661 48.602,27.461 D4.1@48.512,27.371 47.548,26.407 J2.2@46.902,26.407
RS485_RX: B1.32 U3.1 | length 14.1
  Top Layer w0.15: B1.32@16.475,26.459 16.475,27.524 19.177,30.226 v1(25.4,30.226)
  Bottom Layer w0.15: v1(25.4,30.226) 26.924,28.702 27.309,28.702 27.559,28.452 U3.1@27.559,28.366
RS485_TX: B1.31 U3.4 | length 17
  Top Layer w0.15: B1.31@16.975,26.459 17.026,26.51 17.026,27.313 19.431,29.718 v1(26.924,29.718)
  Bottom Layer w0.15: v1(26.924,29.718) 30.48,29.718 30.734,29.464 30.734,29.439 31.369,28.804 U3.4@31.369,28.366
TEST: B1.2 C15.1 R15.1 SB4.1 | length 19.9
  Top Layer w0.15: SB4.1@3.429,7.12 3.829,7.12 4.218,6.731 v1(4.826,6.731) ; v1(6.604,8.128) 14.097,15.621 14.097,15.875 14.975,16.753 B1.2@14.975,17.983
  Bottom Layer w0.15: R15.1@3.429,7.559 R15.1@3.529,7.559 ; v1(4.826,6.731) 4.357,6.731 R15.1@3.529,7.559 ; v1(6.604,8.128) 6.536,8.128 6.292,7.884 5.659,7.884 C15.1@5.334,7.559 R15.1@3.529,7.559
VDDA: B1.21 C19.1 FB1.1 | length 4.8
  Top Layer w0.329: B1.21@21.463,23.471 22.89,23.471 23.168,23.749 v2(23.241,23.749)
  Bottom Layer w0.329: v2(23.241,23.749) 22.273,23.749 22.063,23.959 22.063,24.047 22.273,24.258 22.926,24.258 FB1.1@23.36,24.692
VREF+: B1.20 C20.1 FB2.1 | length 5.4
  Top Layer w0.329: B1.20@21.463,22.971 23.311,22.971 23.422,22.86 v2(23.495,22.86)
  Bottom Layer w0.329: C20.1@22.063,22.352 22.063,22.427 22.273,22.638 22.348,22.638 22.571,22.86 v2@23.489,22.86
  Bottom Layer w0.39: C20.1@22.113,22.302 22.113,20.751 FB2.1@22.163,20.701
pads on no net: B1.3 B1.4 B1.13 B1.14 B1.15 B1.16 B1.17 B1.18 B1.22 B1.25 B1.28 B1.29 B1.30 B1.33 B1.34 B1.41 B1.42 B1.43 J1.3 J1.4 J2.5 J3.6 J3.7 J3.8 J3.9 J5.3 J5.4 U2.5 U2.8
copper on no net:
  other v2: 13.589,33.147
  other v7: 35.56,5.08 12.7,51.435

## Polygon pours and split planes (outlines as drawn)
NetC1_1 on Bottom Layer "NETC1_1_L04_P003" (solid, pour order 3): 27.94,42.291 28.321,42.672 30.861,42.672 31.115,42.926 31.115,43.815 32.004,43.815 32.004,34.544 31.75,34.29 27.94,34.29
+3V3 on Bottom Layer "+3V3_L04_P000" (solid, pour order 0): 25.019,40.767 23.241,40.767 19.558,37.211 14.859,37.211 14.249,36.703 13.208,36.703 13.208,33.909 22.733,33.909 25.019,34.29
GND on Int2 (PWR) "GND_L03_P005" (solid, pour order 5): 0,56 52,56 52,0 0,0

## Silkscreen, mask and mechanical layers (free items; w line width, h text height)
Mechanical 1:
  lines w0.254: 16.637,38.989 20.955,38.989 22.86,40.894 23.114,41.148 25.146,41.148 25.527,40.767 25.527,34.163 24.892,33.528 12.192,33.528 11.684,33.02 11.684,31.623 12.192,31.115 12.827,30.48 36.068,30.48 36.957,31.369 36.957,51.054 35.052,52.959 29.083,52.959 28.226,52.959 25.019,49.752 25.019,43.942 24.765,43.688 24.511,43.688 20.193,43.688 ; 27.559,34.163 27.559,40.894 27.94,41.275 28.067,41.402 28.067,44.323 28.067,47.752 28.448,48.133 28.829,48.133 29.337,48.641 29.337,50.292 29.654,50.609 30.29,51.244 30.607,51.562 32.766,51.562 33.782,50.546 33.782,36.83 30.353,33.401 28.321,33.401 27.559,34.163
Mechanical 2:
  the board outline again, w0.1